# Altium PCB PCB1.PcbDoc
Units mm, origin at the board's own origin, x right, y up, seen from the top; angles counter-clockwise.
Board outline 58.67 x 40.77 mm, 2 copper layers (Top Layer, Bottom Layer); 35 components, 50 nets, 155 pads, 81 vias.
Unrouted connection lines stored in the file: 3.
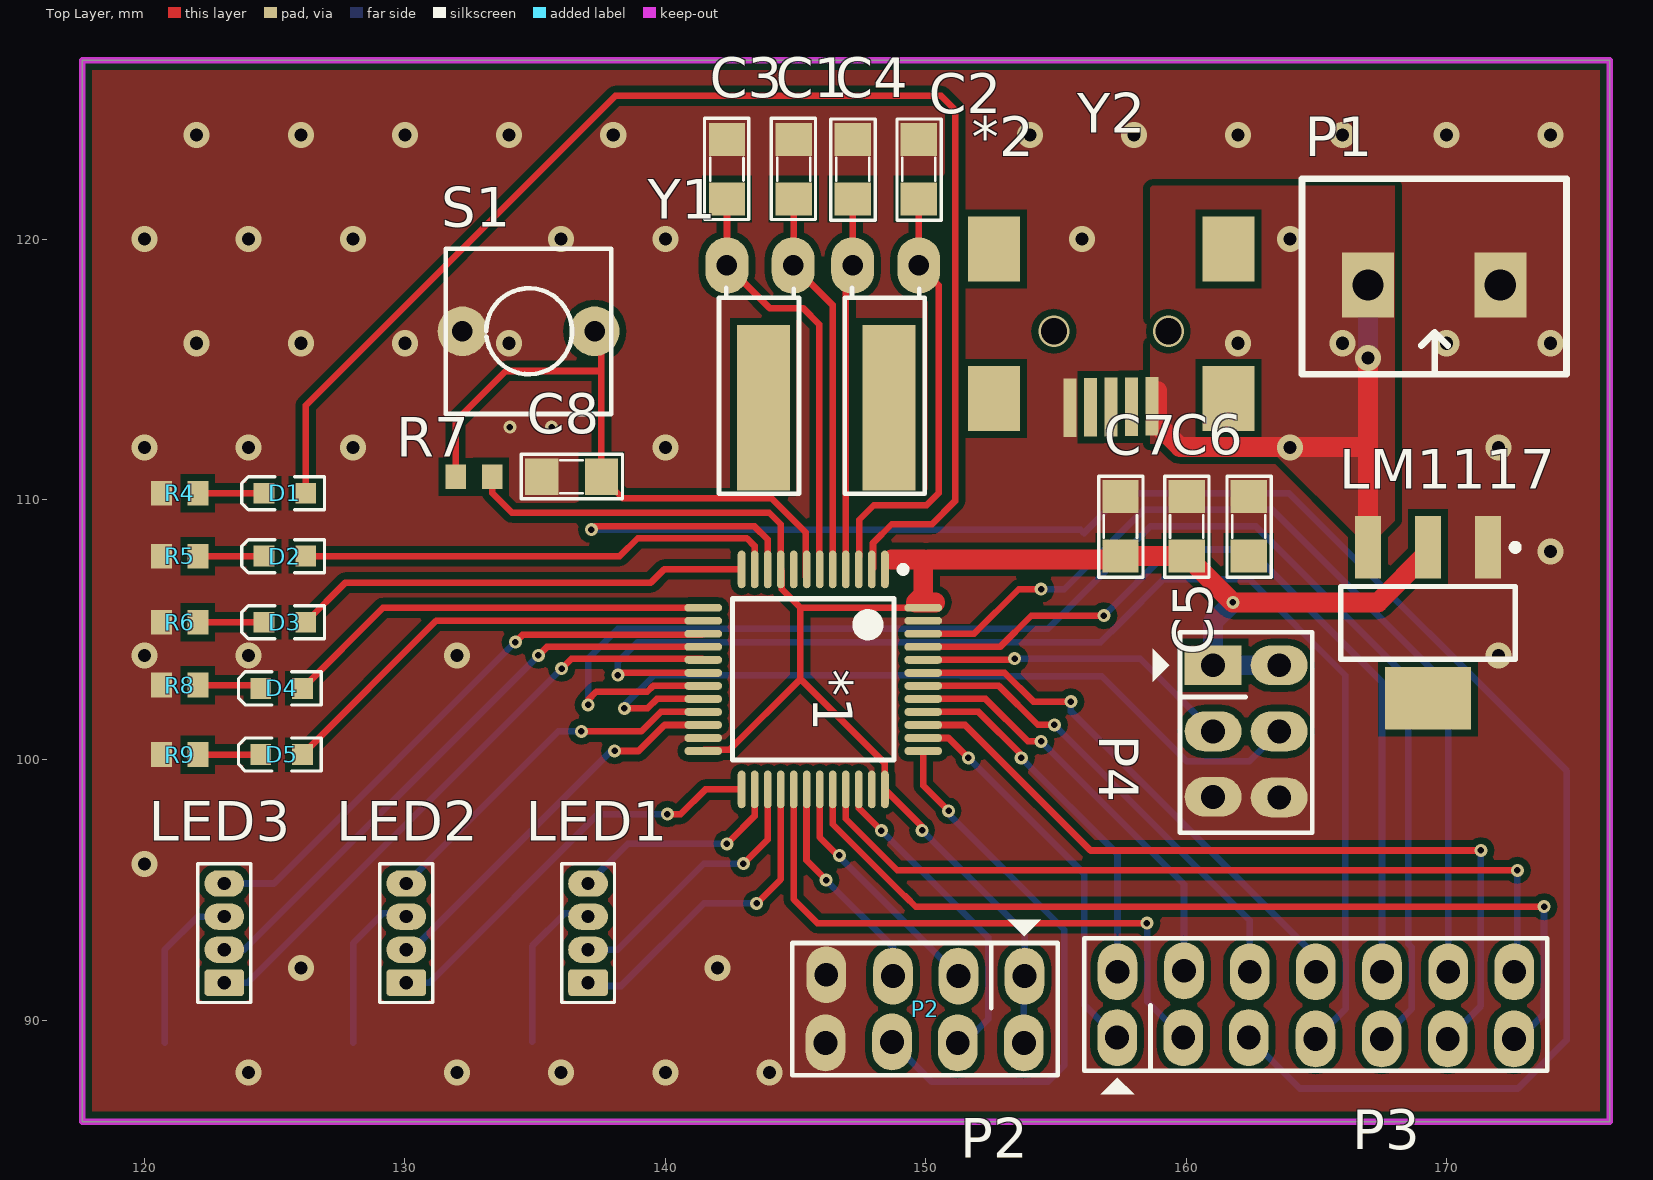
[diagram p0: Top Layer view]
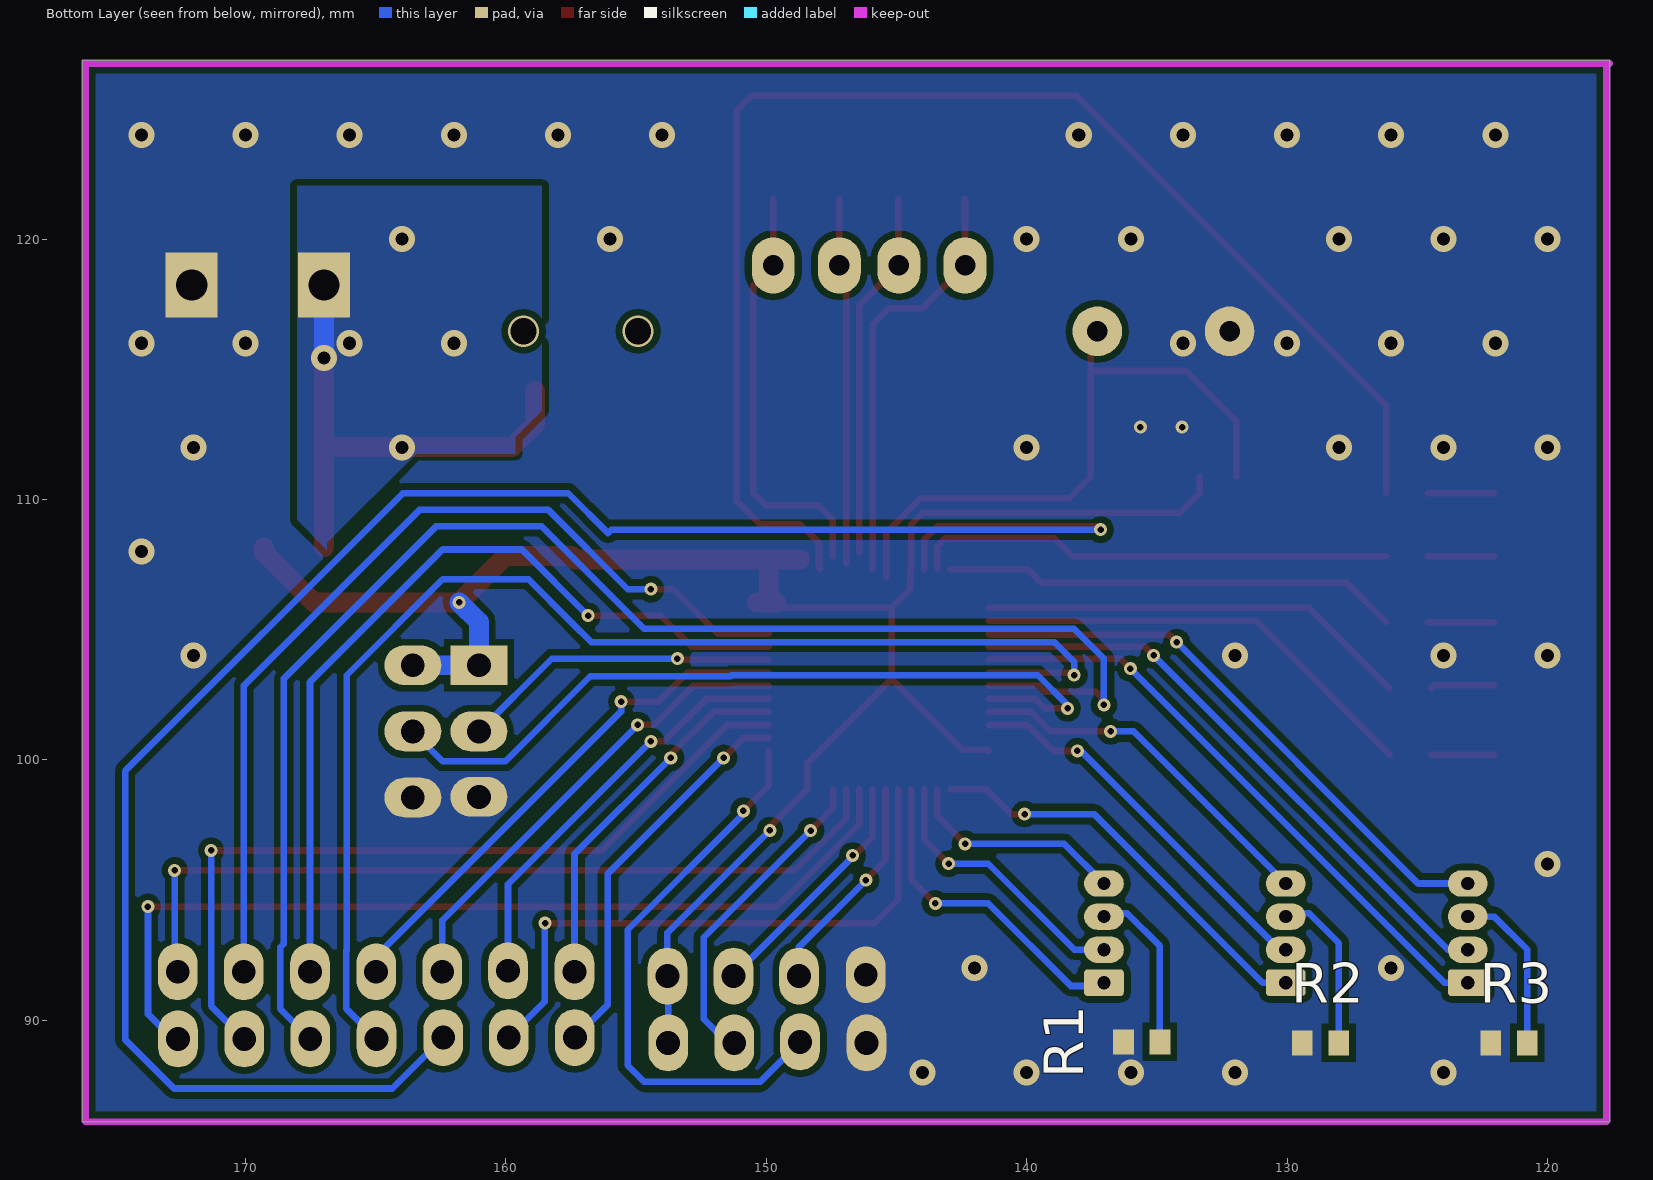
[diagram p1: Bottom Layer view, seen from below]
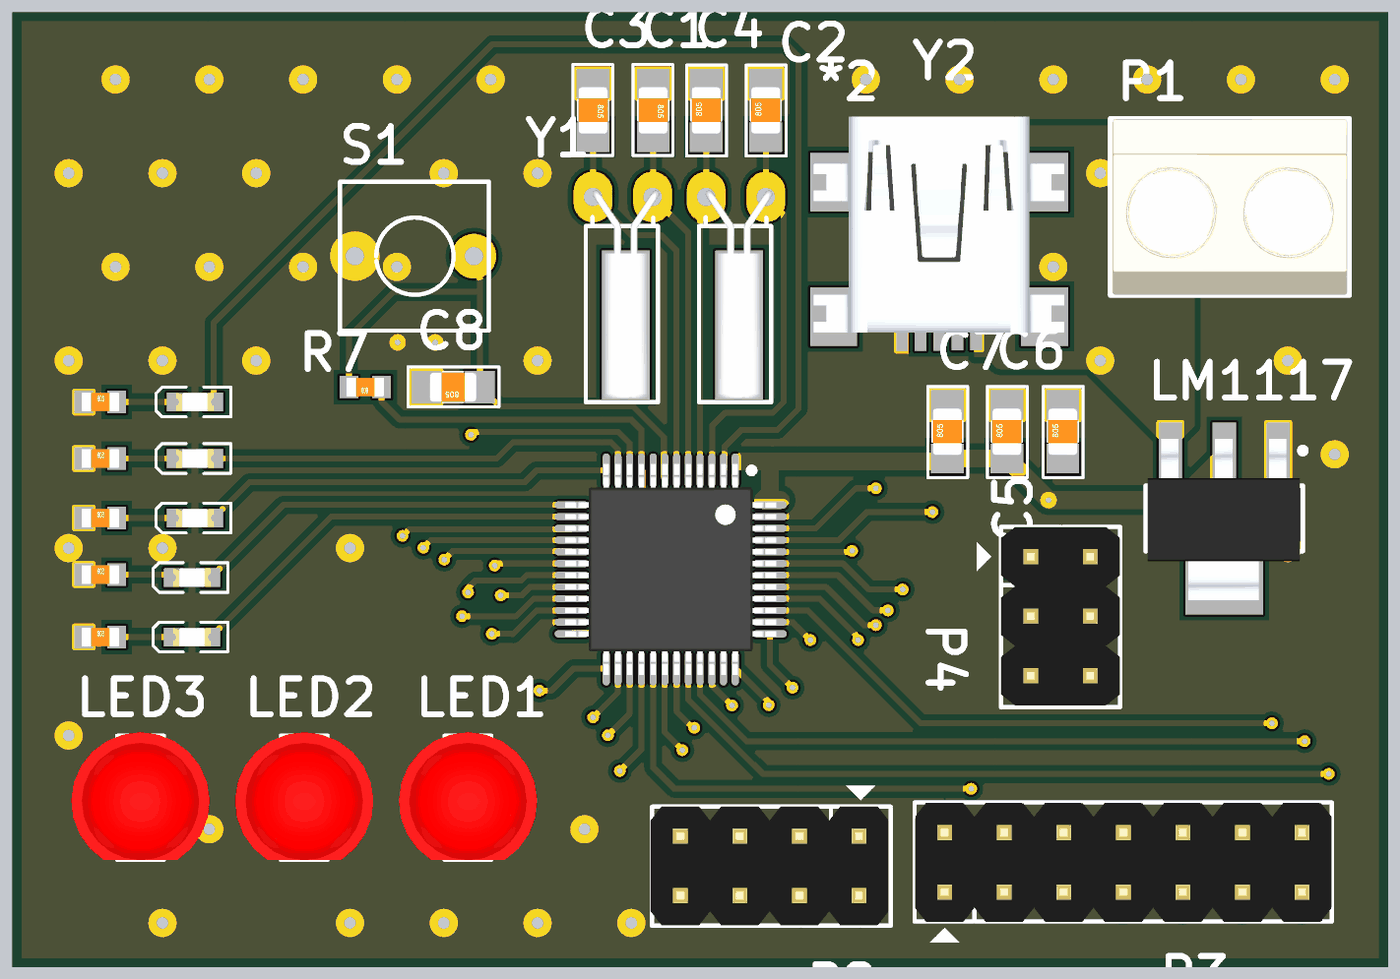
[diagram p2: 3D render of the assembled board from above, using the file's embedded part models]
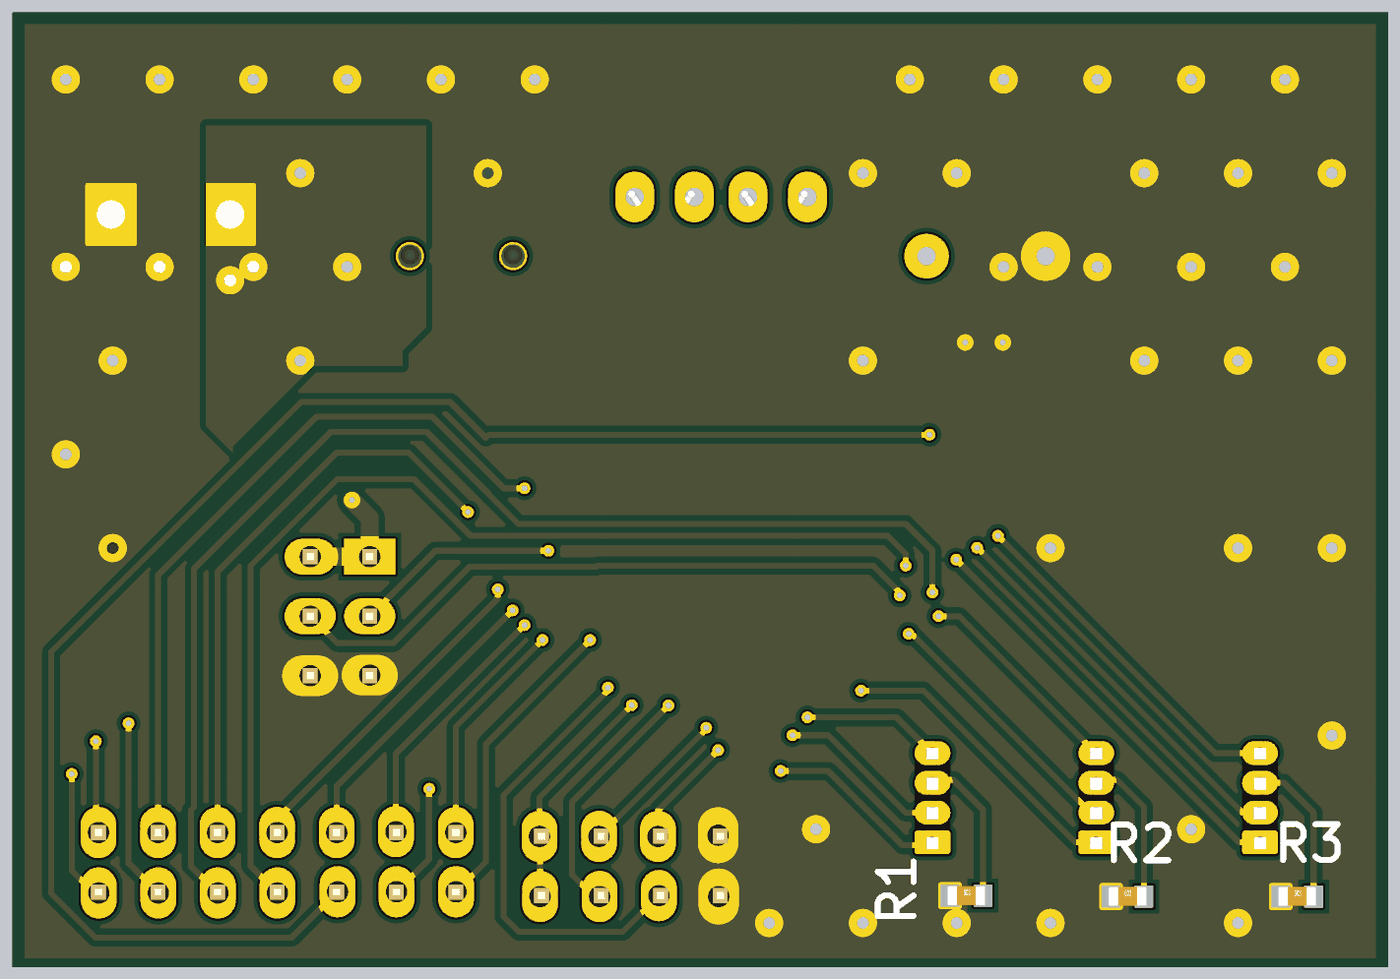
[diagram p3: 3D render of the assembled board from below, using the file's embedded part models]

## Layer stack, top to bottom
Top Solder: solder mask 0.0102, Solder Resist, Dk 3.5
Top Layer: signal copper 0.0356
Dielectric 1: dielectric 0.32, FR-4, Dk 4.8
Bottom Layer: signal copper 0.0356
Bottom Solder: solder mask 0.0102, Solder Resist, Dk 3.5

## Board outline
117.602,86.106 117.602,126.873 176.276,126.873 176.276,86.106

## Design rules (kind name [scope] priority, off if disabled: settings)
Clearance [All] p1: gap=0.254 ignorepadtopadclearanceinfootprint=FALSE except(0.178: Arc-SMDPad Track-SMDPad SMDPad-SMDPad; 0.203: Arc-Arc Arc-Track Track-Track)
PlaneConnect [All] p1: planeconnectstyle=Direct reliefexpansion=0.508 reliefentries=4 reliefconductorwidth=0.254 reliefairgap=0.254
PolygonConnect [All] p1: connectstyle=Direct reliefconductorwidth=0.254 reliefentries=4 polygonreliefangle="90 Angle" airgapwidth=0.254
RoutingVias [All] p1: holewidth=0.711 width=1.27 viastyle="Through Hole" minholewidth=0.711 minwidth=1.27 maxholewidth=0.711 maxwidth=1.27
SolderMaskExpansion [All] p1: expansion=0.102
Width [All] p1: maxlimit=0.762 minlimit=0.254 preferedwidth=0.508
29 further rules are at their usual default settings.

## Components (designator, comment, footprint, x,y, rotation, side; value= is the part's Value field where it differs from the comment)
*1 "STM32F103C8T6" TSQFP50P900X900X160-48N 145.681,103.09 r270 top
*2 "USB M" USB-B-MINI-SMD 158.699,113.576 r0 top
C1 "Cap Non-Pol SMD" CAP-SM-0805 144.931,123.825 r270 top value=33pF
C2 "Cap Non-Pol SMD" CAP-SM-0805 149.733,121.539 r90 top value=100pF
C3 "Cap Non-Pol SMD" CAP-SM-0805 142.367,123.825 r270 top value=33pF
C4 "Cap Non-Pol SMD" CAP-SM-0805 147.193,121.539 r90 top value=100pF
C5 "Cap Non-Pol SMD" CAP-SM-0805 162.408,107.823 r90 top value=100nF
C6 "Cap Non-Pol SMD" CAP-SM-0805 160.02,107.823 r90 top value=100nF
C7 "Cap Non-Pol SMD" CAP-SM-0805 157.48,107.823 r90 top value=1uF
C8 "Cap Non-Pol SMD" CAP-SM-0805 137.541,110.871 r180 top value=100nF
D1 "LED SMD" LED_0603_Blue 125.387,110.236 r180 top
D2 "LED SMD" LED_0603_Blue 125.387,107.823 r180 top
D3 "LED SMD" LED_0603_Blue 125.387,105.283 r180 top
D4 "LED SMD" LED_0603_Blue 125.26,102.743 r180 top
D5 "LED SMD" LED_0603_Blue 125.26,100.203 r180 top
LED1 "LED RGB" "led rgb" 137.033,91.44 r90 top
LED2 "LED RGB" "led rgb" 130.048,91.44 r90 top
LED3 "LED RGB" "led rgb" 123.063,91.44 r90 top
LM1117 "LM1117" SOT223-4N 169.291,105.262 r270 top value=LM317
P1 "Domino 2" "DOMINO 2- 5mm" 169.531,118.237 r180 top
P2 "Header 4X2" JP4x2 149.974,90.437 r180 top
P3 "Header 7X2" JP7X2 157.366,89.319 r0 top
P4 "Header 3X2" JP3x2 162.306,101.092 r270 top
R1 "RESISTOR SMD" RES-SM-0603 136.271,89.167 r180 bottom value=220
R2 "RESISTOR SMD" RES-SM-0603 129.399,89.129 r180 bottom value=220
R3 "RESISTOR SMD" RES-SM-0603 122.163,89.129 r180 bottom value=220
R4 "RESISTOR SMD" RES-SM-0603 120.664,110.236 r0 top value=220
R5 "RESISTOR SMD" RES-SM-0603 120.661,107.823 r0 top value=220
R6 "RESISTOR SMD" RES-SM-0603 120.661,105.283 r0 top value=220
R7 "RESISTOR SMD" RES-SM-0603 133.339,110.871 r180 top value=10K
R8 "RESISTOR SMD" RES-SM-0603 120.661,102.87 r0 top value=220
R9 "RESISTOR SMD" RES-SM-0603 120.661,100.203 r0 top value=220
S1 "Tact SW - 2Pin" SW2 137.287,116.459 r180 top
Y1 "XTAL" "XTAL 32KN" 142.367,118.986 r270 top
Y2 "XTAL" "XTAL 32KN" 147.193,118.986 r270 top

## Footprints (in the part's own frame and the unit in brackets; to place one, negate y for a bottom-side part, rotate by r counter-clockwise, add the part's x,y. Pads: shape width x height; smd on the part's side, far side on the other; paste and mask are expansions set on the pad)
CAP-SM-0805 [mil]
  rect 50x55 smd: 1(0,0) 2(90,0)
  silkscreen extent -32,-34 121,33, body extent 6,-25 84,25, height 31
"DOMINO 2- 5mm" [mm]
  rect 2x2.5 hole 1.2: 1(-2.54,0) 2(2.54,0)
  silkscreen extent -5.08,-4.08 5.08,3.43, body extent -5,-4.07 5,3.43, height 10
JP3x2 [mil] "Connector 3x2"
  rect 60x86 hole 36: 1(-100,-50)
  oval 60x86 hole 36: 2(0,-50) 3(99,-50) 4(-100,50) 5(0,50) 6(100,50)
  silkscreen extent -150,-141 153,100, body extent -150,-100 150,100, height 335
JP4x2 [mil] "Connector 4x2"
  oval 60x86 hole 36: 1(-150.5,-49.5) 2(-50.5,-49.5) 3(48.5,-49.5) 4(149.5,-51.5) 5(-149.5,51.5) 6(-49.5,51.5) 7(50,50) 8(150.5,51.5)
  silkscreen extent -200,-135 200,101, body extent -197,-100 203,100, height 335
JP7X2 [mil]
  oval 60x86 hole 36: 1(-0.5,0.5) 2(99.5,0.5) 3(198.5,0.5) 4(299.5,-1.5) 5(399.5,-1.5) 6(499.5,-1.5) 7(599.5,-1.5) 8(0,100) 9(100.5,101.5) 10(200,100) 11(300,100) 12(400,100) 13(500,100) 14(600,100)
  silkscreen extent -50,-85 650,150, body extent -50,-50 650,150, height 335
"led rgb" [mil] "Connector; Header; 6 Position, 0.050\" pitch"
  rrect25% 40x60 hole 20: 1(0,0)
  oval 40x60 hole 20: 2(50,0) 3(100,0) 4(150,0)
  silkscreen extent -30,-40 180,40, body extent -30,-116 185,116, height 378
LED_0603_Blue [mm] "Chip LED, 2-Leads, Body 1.6x0.8mm, IPC Medium Density"
  rect 0.8x0.8 smd: 1(-0.8,0) 2(0.8,0)
  silkscreen extent -1.52,-0.64 1.65,0.64, body extent -0.8,-0.4 0.8,0.4, height 0.7
RES-SM-0603 [mm]
  rect 0.8x0.95 smd: 1(-0.014,0) 2(1.386,0)
  body extent -0.11,-0.4 1.49,0.4, height 0.3
SOT223-4N [mm] "SOT223, 4-Leads, Body 6.5x3.5mm, Pitch 2.3mm, Lead Span 7mm, IPC Medium Density"
  rect 2.4x1 smd: 1(-2.9,2.3) 2(-2.9,0) 3(-2.9,-2.3)
  rect 2.4x3.3 smd: 4(2.9,0)
  silkscreen extent -3.02,-3.35 1.4,3.48, body extent -3.39,-3.27 3.5,3.23, height 1.72
SW2 [mil] "SW button 2pin, 250x 250 mil"
  round 75 hole 31: 1(0,0) 2(200,0)
  silkscreen extent -25,-125 225,125
TSQFP50P900X900X160-48N [mm] "TSQFP, 48-Leads, Body 7.00x7.00mm, Pitch 0.50mm, IPC Medium Density"
  oval 1.45x0.3 smd: 1(-4.225,2.75) 2(-4.225,2.25) 3(-4.225,1.75) 4(-4.225,1.25) 5(-4.225,0.75) 6(-4.225,0.25) 7(-4.225,-0.25) 8(-4.225,-0.75) 9(-4.225,-1.25) 10(-4.225,-1.75) 11(-4.225,-2.25) 12(-4.225,-2.75) 25(4.225,-2.75) 26(4.225,-2.25) 27(4.225,-1.75) 28(4.225,-1.25) 29(4.225,-0.75) 30(4.225,-0.25) 31(4.225,0.25) 32(4.225,0.75) 33(4.225,1.25) 34(4.225,1.75) 35(4.225,2.25) 36(4.225,2.75)
  oval 0.3x1.45 smd: 13(-2.75,-4.225) 14(-2.25,-4.225) 15(-1.75,-4.225) 16(-1.25,-4.225) 17(-0.75,-4.225) 18(-0.25,-4.225) 19(0.25,-4.225) 20(0.75,-4.225) 21(1.25,-4.225) 22(1.75,-4.225) 23(2.25,-4.225) 24(2.75,-4.225) 37(2.75,4.225) 38(2.25,4.225) 39(1.75,4.225) 40(1.25,4.225) 41(0.75,4.225) 42(0.25,4.225) 43(-0.25,4.225) 44(-0.75,4.225) 45(-1.25,4.225) 46(-1.75,4.225) 47(-2.25,4.225) 48(-2.75,4.225)
  silkscreen extent -4.35,-3.1 3.1,3.58, body extent -4.5,-4.5 4.5,4.5, height 1.6
USB-B-MINI-SMD [mm]
  rect 2x2.5 smd: 0(-6.075,0.305) 0(-6.071,6.045) 0(2.925,0.305) 0(2.929,6.045)
  rect 0.5x2.25 smd: 1(0,0) 2(-0.787,-0.013) 3(-1.575,-0.025) 4(-2.362,-0.038) 5(-3.15,-0.051)
  body extent -6.92,-0.37 3.78,8.83, height 3.95
"XTAL 32KN" [mil] "Crystal for 32,768kHz, 2pin"
  oval 85x65 hole 31: 1(0,0) 2(0,100)
  rect 250x80 smd: 3(215,55)
  silkscreen extent 34,-12 345,109, body extent -11,-1 339,111, height 79

## Part data
*1: Manufacturer=ST, ComponentLink1Description="Supplier 1 Link"
C1 C2 C3 C4 C5 C6 C7 C8: "Capacitor"
D1 D2 D3 D4 D5: "LED"
LM1117: "Available in 1.8V, 2.5V, 2.85V, 3.3V, 5V, and  Adjustable Versions"
P1: "Domino, 2-Pin", LatestRevisionDate=17-Jul-2002, LatestRevisionNote="Re-released for DXP Platform.", Publisher="Altium Limited"
P2: "Header, 4-Pin, Dual row", LatestRevisionDate=17-Jul-2002, LatestRevisionNote="Re-released for DXP Platform.", Publisher="Altium Limited"
P3: "Header, 7-Pin, Dual row", LatestRevisionDate=17-Jul-2002, LatestRevisionNote="Re-released for DXP Platform.", Publisher="Altium Limited"
P4: "Header, 3-Pin, Dual row", LatestRevisionDate=17-Jul-2002, LatestRevisionNote="Re-released for DXP Platform.", Publisher="Altium Limited"
R1 R2 R3 R4 R5 R6 R7 R8 R9: "Resistor"
S1: "Switch button 2 pin"
Y1 Y2: "Crystal Oscillator", LatestRevisionDate=17-Jul-2002, LatestRevisionNote="Re-released for DXP Platform.", PackageDescription="Crystal, Thru-Hole; 2 Leads; Body 3.1 x 8.2 mm (Dia.xH)", PackageReference=R38, Published=8-Jun-2000, Publisher="Altium Limited"

## Via types
v1: diameter 1, hole 0.5, Top Layer to Bottom Layer, 46 vias
v2: diameter 0.5, hole 0.25, Top Layer to Bottom Layer, 33 vias
v3: diameter 1.2, hole 1, Top Layer to Bottom Layer, 2 vias

## Nets (pads, with @x,y where several pads share a name; then routed paths per layer and width w, separated by ;. In a path a pad name is that pad's centre, name@x,y a point inside that pad or via, vN(x,y) a via of type N, cw(c..) or ccw(c..) an arc to the next point about the centre after c; other vN are vias at no path point)
3.3v: *1.1 *1.9 *1.24 *1.36 *1.48 C6.1 C7.1 LM1117.2 P2.1 P2.5 P4.1 P4.4 R7.1 | length 75.5
  Top Layer w0.254: R7.1 133.353,110.248 134.112,109.489 143.992,109.489 144.431,109.049 *1.9 144.476,107.27 144.476,106.552 145.188,105.84 ; *1.24 141.501,100.385 142.468,100.385 145.188,103.105 ; v2(149.86,97.295) 149.86,97.436 *1.36 148.431,99.862 145.188,103.105 ; *1.48 145.188,105.84 ; 145.188,103.105 145.188,105.84
  Top Layer w0.762: 148.699,107.696 149.906,107.696 149.906,106.336 149.619,106.049 150.368,106.049 ; 150.114,107.696 157.353,107.696 C7.1 C6.1 v2(161.794,106.049) 167.368,106.049 169.291,107.972 LM1117.2
  Bottom Layer w0.254: v2(149.86,97.295) 153.797,93.358 P2.1 153.772,91.669 P2.5
  Bottom Layer w0.762: v2(161.794,106.049) 161.036,105.291 P4.1 P4.4
+5: *2.1 C5.1 LM1117.3 P1.2 | length 20.4
  Top Layer w0.762: *2.1@158.877,114.174 158.877,112.903 159.766,112.014 166.991,112.014 ; P1.2@166.566,117.813 P1.2 ; LM1117.3 166.991,112.014 ; v1@167.005,115.443 v1(166.991,115.429) 166.991,112.014
  Bottom Layer w0.762: v1(166.991,115.429) P1.2
  other v1: 164,112 162,116 166,116 164,120
BOOT0: *1.44 P4.2 | length 12.3
  Top Layer w0.254: *1.44 153.371,103.84 v2(153.416,103.885)
  Bottom Layer w0.254: v2(153.416,103.885) 158.243,103.885 P4.2
BOOT1: *1.20 P4.5 | length 30.8
  Top Layer w0.254: v2(138.43,101.981) 139.319,101.981 139.678,102.34 *1.20
  Bottom Layer w0.254: v2(138.43,101.981) 138.43,102.108 139.573,103.251 151.335,103.251 151.377,103.209 156.76,103.209 160.02,99.949 162.433,99.949 P4.5
GND: *1.8 *1.23 *1.35 *1.47 *2.5 C1.1 C2.2 C3.1 C4.2 C5.2 C6.2 C7.2 C8.2 LM1117.1 P1.1 P2.4 P2.8 P4.3 P4.6 R1.1 R2.1 R3.1 R4.1 R5.1 R6.1 R8.1 R9.1 S1.2
  other v1: 124,88 132,88 136,88 140,88 144,88 126,92 142,92 120,96 120,104 124,104 132,104 172,104 174,108 120,112 124,112 128,112 140,112 172,112 122,116 126,116 130,116 134,116 170,116 174,116 120,120 124,120 128,120 136,120 140,120 156,120 122,124 126,124 130,124 134,124 138,124 154,124 158,124 162,124 166,124 170,124 174,124
  other v2: 134.032,112.776 135.636,112.776
LED1: *1.2 D1.1 | length 53.3
  Top Layer w0.254: D1.1 126.187,113.614 138.074,125.501 150.597,125.501 151.13,124.968 151.13,109.938 150.241,109.049 148.699,109.049 147.976,108.327 147.976,107.36 *1.2
LED2: *1.11 D2.1 | length 18.5
  Top Layer w0.254: D2.1 138.252,107.823 138.938,108.509 143.134,108.509 143.431,108.212 *1.11
LED3: *1.12 D3.1 | length 17.6
  Top Layer w0.254: D3.1 127.711,106.807 139.446,106.807 139.954,107.315 *1.12
LED4: *1.13 D4.1 | length 16.7
  Top Layer w0.254: D4.1 129.157,105.84 *1.13
LED5: *1.14 D5.1 | length 17.5
  Top Layer w0.254: D5.1 131.197,105.34 *1.14
LRGB1_B: *1.28 LED1.1 | length 12.6
  Top Layer w0.254: v2(143.51,94.488) 144.431,95.409 *1.28
  Bottom Layer w0.254: LED1.1 137.16,91.313 138.303,91.313 141.478,94.488 v2(143.51,94.488)
LRGB1_G: *1.27 LED1.2 | length 10.6
  Top Layer w0.254: v2(143.002,96.012) 143.931,96.941 *1.27
  Bottom Layer w0.254: LED1.2 138.176,92.71 141.478,96.012 v2(143.002,96.012)
LRGB1_R: *1.26 LED1.4 | length 8.3
  Top Layer w0.254: v2@142.494,96.901 143.431,97.838 *1.26
  Bottom Layer w0.254: LED1.4 138.557,96.774 v2(142.367,96.774)
LRGB2_B: *1.25 LED2.1 | length 16
  Top Layer w0.254: v2(140.081,97.917) 140.589,97.917 141.537,98.865 *1.25
  Bottom Layer w0.254: LED2.1 130.937,91.44 137.414,97.917 v2(140.081,97.917)
LRGB2_G: *1.22 LED2.2 | length 15
  Top Layer w0.254: v2(138.049,100.34) 138.938,100.34 138.955,100.323 139.971,101.34 *1.22
  Bottom Layer w0.254: LED2.2 130.289,92.71 137.919,100.34 v2(138.049,100.34)
LRGB2_R: *1.21 LED2.4 | length 14.1
  Top Layer w0.254: v2(136.779,101.092) 139.077,101.092 139.825,101.84 *1.21
  Bottom Layer w0.254: LED2.4 135.89,101.092 v2(136.779,101.092)
LRGB3_B: *1.17 LED3.1 | length 23.6
  Top Layer w0.254: v2@136.017,103.505 v2(136.02,103.505) 136.398,103.883 141.413,103.883 *1.17
  Bottom Layer w0.254: LED3.1 123.955,91.44 v2(136.02,103.505)
LRGB3_G: *1.16 LED3.2 | length 23.2
  Top Layer w0.254: v2(135.128,104.013) 135.455,104.34 *1.16
  Bottom Layer w0.254: LED3.2 123.825,92.71 v2(135.128,104.013)
LRGB3_R: *1.15 LED3.4 | length 22.4
  Top Layer w0.254: v2(134.239,104.521) 134.515,104.797 141.413,104.797 *1.15
  Bottom Layer w0.254: LED3.4 124.968,95.25 v2(134.239,104.521)
Net*1_3: *1.3 C2.1 Y2.2 | length 16.5
  Top Layer w0.254: *1.3@147.447,107.823 147.447,109.22 148.005,109.778 150.037,109.778 150.495,110.236 150.495,118.224 Y2.2 C2.1
Net*1_4: *1.4 C4.1 Y2.1 | length 14.1
  Top Layer w0.254: *1.4@146.931,107.533 146.931,118.724 Y2.1 C4.1
Net*1_5: *1.5 C1.2 Y1.2 | length 14.2
  Top Layer w0.254: C1.2 144.931,119.01 Y1.2 146.423,117.47 *1.5@146.423,107.95
Net*1_6: *1.6 C3.2 Y1.1 | length 16.5
  Top Layer w0.254: C3.2 Y1.1 144.005,117.348 145.288,117.348 145.915,116.721 145.915,107.331 *1.6
NetD1_2: D1.2 R4.2 | length 2.5
  Top Layer w0.254: R4.2 D1.2
NetD2_2: D2.2 R5.2 | length 2.5
  Top Layer w0.254: R5.2 D2.2
NetD3_2: D3.2 R6.2 | length 2.5
  Top Layer w0.254: R6.2 D3.2
NetD4_2: D4.2 R8.2 | length 2.5
  Top Layer w0.254: R8.2 124.333,102.87 D4.2
NetD5_2: D5.2 R9.2 | length 2.4
  Top Layer w0.254: R9.2 D5.2
NetLED1_3: LED1.3 R1.2 | length 6.4
  Bottom Layer w0.254: R1.2 134.885,92.848 136.144,94.107 136.906,94.107 LED1.3
NetLED2_3: LED2.3 R2.2 | length 6.4
  Bottom Layer w0.254: R2.2 128.013,92.961 129.159,94.107 129.921,94.107 LED2.3
NetLED3_3: LED3.3 R3.2 | length 6.4
  Bottom Layer w0.254: R3.2 120.777,92.71 122.047,93.98 LED3.3
NRST: *1.7 C8.1 R7.2 S1.1 | length 24.7
  Top Layer w0.254: R7.2 131.953,113.017 133.871,114.935 137.541,114.935 ; S1.1 137.541,116.205 137.541,114.935 ; *1.7@145.386,107.031 145.386,108.741 144.082,110.045 138.367,110.045 C8.1 137.541,114.935
PA0: *1.10 P3.3 | length 74.9
  Top Layer w0.254: v2(137.16,108.839) 137.287,108.966 143.431,108.966 143.931,108.466 *1.10
  Bottom Layer w0.254: v2(137.16,108.839) 155.956,108.839 156.083,108.712 157.607,110.236 163.957,110.236 174.625,99.568 174.625,89.256 172.745,87.376 164.363,87.376 P3.3
PA8: *1.29 P3.2 | length 23.1
  Top Layer w0.254: *1.29 144.931,94.639 145.844,93.726 v2(158.496,93.726)
  Bottom Layer w0.254: v2(158.496,93.726) 158.509,93.713 158.509,90.716 P3.2
PA11: *1.32 P3.7 | length 35.7
  Top Layer w0.254: *1.32 146.431,97.523 149.212,94.742 149.225,94.755 149.619,94.361 v2(173.749,94.361)
  Bottom Layer w0.254: P3.7 172.796,89.281 173.749,90.233 v2(173.749,94.361)
PA12: *1.33 P3.14 | length 31.7
  Top Layer w0.254: *1.33 146.931,97.734 148.907,95.758 v2(172.72,95.758)
  Bottom Layer w0.254: P3.14 172.72,91.973 v2(172.72,95.758)
PA15: *1.38 P3.1 | length 15.2
  Top Layer w0.254: *1.38 150.874,100.84 v2(151.638,100.076)
  Bottom Layer w0.254: v2(151.638,100.076) 156.083,95.631 156.083,90.602 P3.1
PB0: *1.18 P3.4 | length 49.2
  Top Layer w0.254: v2(138.176,103.251) 138.176,103.175 138.341,103.34 *1.18
  Bottom Layer w0.254: v2(138.176,103.251) 138.176,103.759 138.938,104.521 156.721,104.521 157.476,105.276 157.476,105.279 159.131,106.934 162.433,106.934 166.116,103.251 166.116,92.688 166.129,92.675 166.129,90.437 P3.4
PB1: *1.19 P3.5 | length 57
  Top Layer w0.254: v2(137.033,102.108) 137.033,102.302 137.343,102.612 139.303,102.612 139.531,102.84 *1.19
  Bottom Layer w0.254: v2(137.033,102.108) 137.033,103.886 138.176,105.029 154.689,105.029 155.952,106.292 155.952,106.295 158.623,108.966 162.687,108.966 168.529,103.124 168.529,92.942 168.669,92.802 168.669,90.437 P3.5
PB3: *1.39 P3.6 | length 31.2
  Top Layer w0.254: *1.39 151.514,101.34 156.334,96.52 v2(171.323,96.52)
  Bottom Layer w0.254: P3.6 171.323,90.551 v2(171.323,96.52)
PB4: *1.40 P3.8 | length 14.3
  Top Layer w0.254: *1.40 152.033,101.84 153.67,100.203 v2(153.67,100.076)
  Bottom Layer w0.254: v2(153.67,100.076) 157.366,96.38 P3.8
PB5: *1.41 P3.9 | length 16.3
  Top Layer w0.254: *1.41 152.295,102.34 153.924,100.711 v2(154.432,100.711)
  Bottom Layer w0.254: v2(154.432,100.711) 159.918,95.225 P3.9
PB6: *1.42 P3.10 | length 18.2
  Top Layer w0.254: *1.42 152.811,102.84 154.305,101.346 154.934,101.346 v2(154.94,101.34)
  Bottom Layer w0.254: v2(154.94,101.34) 162.446,93.834 P3.10
PB7: *1.43 P3.11 | length 20.4
  Top Layer w0.254: *1.43 153.035,103.34 154.14,102.235 v2(155.575,102.235)
  Bottom Layer w0.254: v2(155.575,102.235) 155.575,101.854 164.986,92.443 P3.11
PB8: *1.45 P3.12 | length 32.4
  Top Layer w0.254: *1.45 152.854,104.34 154.051,105.537 v2(156.845,105.537)
  Bottom Layer w0.254: v2(156.845,105.537) 159.385,108.077 162.433,108.077 167.526,102.984 P3.12
PB9: *1.46 P3.13 | length 35.9
  Top Layer w0.254: *1.46 151.86,104.84 153.573,106.553 v2(154.432,106.553)
  Bottom Layer w0.254: v2(154.432,106.553) 155.321,106.553 158.369,109.601 163.322,109.601 170.066,102.857 P3.13
SW_CLK: *1.37 P2.7 | length 21.8
  Top Layer w0.254: *1.37 149.906,99.014 v2(150.876,98.044)
  Bottom Layer w0.254: P2.7 150.241,87.63 154.686,87.63 155.321,88.265 155.321,93.472 150.876,97.917 v2(150.876,98.044)
SW_DIO: *1.34 P2.6 | length 12.4
  Top Layer w0.254: *1.34 147.431,98.147 v2(148.296,97.282)
  Bottom Layer w0.254: v2(148.296,97.282) 152.4,93.178 152.4,90.043 151.486,89.129 P2.6
UART_RX: *1.31 P2.2 | length 9.4
  Top Layer w0.254: *1.31 145.931,97.02 146.621,96.329 v2(146.685,96.329)
  Bottom Layer w0.254: v2(146.685,96.329) 146.685,96.266 P2.2
UART_TX: *1.30 P2.3 | length 8.5
  Top Layer w0.254: *1.30@145.423,98.865 145.423,96.147 146.177,95.393 v2(146.177,95.377)
  Bottom Layer w0.254: v2(146.177,95.377) 148.742,92.812 P2.3
pads on no net: *2.0 *2.2 *2.3 *2.4 LM1117.4 Y1.3 Y2.3
copper on no net:
  other v3: 154.924,116.461 159.324,116.461

## Polygon pours and split planes (outlines as drawn)
GND on Top Layer "Top Layer-No Net" (solid, pour order 4): 117.602,86.106 117.602,126.873 176.276,126.873 176.276,86.106
+5 on Top Layer "Top Layer-+5" (solid, pour order 0): 158.699,122.047 168.021,122.047 168.021,109.192 166.991,108.162 163.012,112.141 158.623,112.141 158.623,121.971
GND on Bottom Layer "Top Layer-No Net1" (solid, pour order 5): 117.729,86.36 117.729,127.127 176.403,127.127 176.403,86.36
+5 on Bottom Layer "Bottom Layer-+5" (solid, pour order 2): 158.623,122.047 168.021,122.047 168.021,109.22 166.878,108.077 166.878,108.331 163.449,111.76 159.639,111.76 159.639,112.395 158.623,113.411

## Keep-outs
Top Layer:
  the board outline again, w0.254
Bottom Layer:
  lines w0.254: 117.602,126.746 176.149,126.746 176.149,86.106 117.729,86.106 117.729,126.746